# Allegro board pcb_proiect.brd
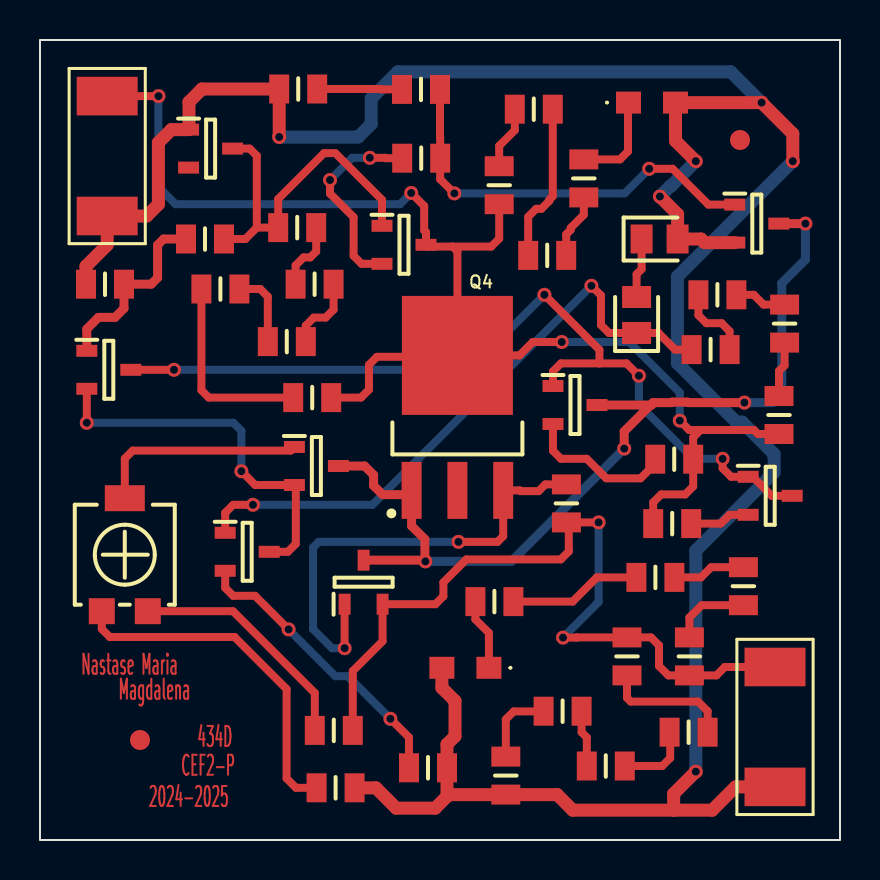
[diagram p0: board, top side]
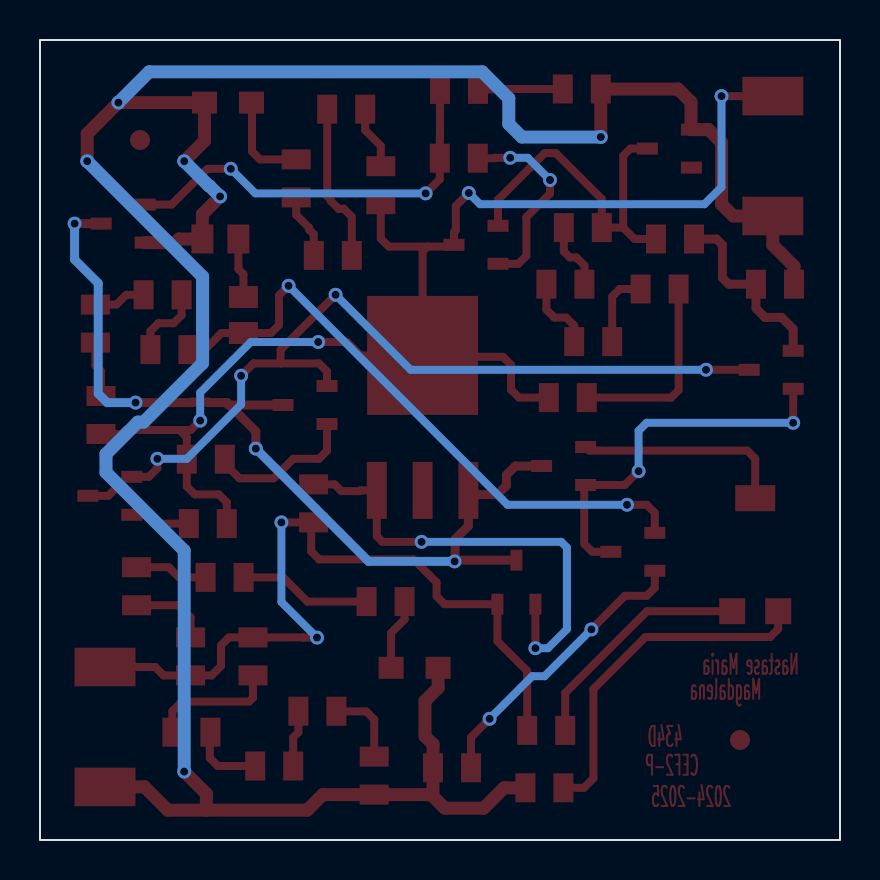
[diagram p1: board, bottom side, seen from below]

Outline 40 x 40 mm; copper layers: TOP, BOTTOM. Coordinates in mm from the lower left corner of the outline.
Outline path: rectangle 0,0 40,40

## Design rules (mm)
nets with their own width: min track width 0.4; nets N58868 N58948 N58962 N59152 N59158 N59164 N59308 N59360 N59366 N59416 N59508 N59514 N59560 N59566 N59572 N59678 N59710 N59736 N59772 N59798 N59804 N59976 N59994 N60030 N60066 N60146 N60152 N60246 N60324 N60330 N591201 N591401 N592241 N594281 N595481 N598561
nets with their own width: min track width 0.45; nets VIN VOUT
nets with their own width: min track width 0.65; nets GND

## Placement (name value [footprint] x y rotation side)
D2  1N4148  [DIOC2012X95N]  29.83 26.25 90 top
D10  1N4148  [DIOC2012X95N]  30.98 30.05 0 top
D16  BZX84C5V1  [SOT95P230X110-3N]  8.53 34.57 0 top
D17  3V,LED,LED  [OFSMD2012B]  30.6 36.87 0 top
D18  3V,LED,LED  [OFSMD2012B]  21.27 8.61 180 top
J1  CON2  [SMR2512]  3.36 31.2 90 top
J2  CON2  [SMR2512]  36.75 8.65 270 top
NOREF  -  [unnamed]  35 35 0 top
NOREF#2  -  [unnamed]  5 5 0 top
Q1  BC846B  [SOT95P230X110-3N]  3.44 23.51 0 top
Q2  BC846B  [SOT95P230X110-3N]  13.82 18.7 0 top
Q3  BC846B  [SOT95P230X110-3N]  10.36 14.41 0 top
Q4  MJD31C  [TO229P990X238-4N]  20.87 21.63 90 top
Q5  BC846B  [SOT95P230X110-3N]  16.18 12.89 90 top
Q6  BC846B  [SOT95P230X110-3N]  35.84 30.82 0 top
Q7  BC846B  [SOT95P230X110-3N]  18.2 29.76 0 top
Q8  BC856B  [SOT95P230X110-3N]  26.75 21.75 0 top
Q9  BC856B  [SOT95P230X110-3N]  36.51 17.21 0 top
R2  200  [RESC2013X65N]  19.4 3.61 0 top
R3  51  [RESC2013X65N]  31.71 19.04 180 top
R5  4.7k  [RESC2013X65N]  14.69 5.48 180 top
R6  2k  [RESC2013X65N]  14.78 2.61 0 top
R9  2k  [TS53YL]  5.39 11.44 270 top
R10  65  [RESC2013X65N]  19.05 37.53 180 top
R11  2k  [RESC2013X65N]  19.06 34.09 0 top
R13  51  [RESC2013X65N]  31.61 15.82 0 top
R15  10k  [RESC2013X65N]  3.25 27.79 180 top
R22  200  [RESC2013X65N]  12.91 37.55 180 top
R25  1.2  [RESC2013X65N]  26.32 16.83 270 top
R26  3.2k  [RESC2013X65N]  8.25 30.05 180 top
R27  500  [RESC2013X65N]  36.95 21.25 90 top
R28  500  [RESC2013X65N]  37.23 25.82 90 top
R29  500  [RESC2013X65N]  33.87 27.26 180 top
R30  500  [RESC2013X65N]  33.53 24.52 180 top
R31  200  [RESC2013X65N]  12.86 30.62 0 top
R32  200  [RESC2013X65N]  13.73 27.79 0 top
R33  200  [RESC2013X65N]  12.34 24.92 180 top
R34  200  [RESC2013X65N]  9.02 27.55 180 top
R35  200  [RESC2013X65N]  13.61 22.12 0 top
R37  150  [RESC2013X65N]  29.35 9.18 90 top
R38  150  [RESC2013X65N]  32.43 5.39 0 top
R39  150  [RESC2013X65N]  28.29 3.7 0 top
R40  150  [RESC2013X65N]  26.13 6.44 0 top
R41  80  [RESC2013X65N]  23.29 3.22 90 top
R42  510  [RESC2013X65N]  22.96 32.74 270 top
R44  510  [RESC2013X65N]  24.69 36.54 180 top
R45  510  [RESC2013X65N]  25.36 29.23 180 top
R46  510  [RESC2013X65N]  27.19 33.08 270 top
R47  100  [RESC2013X65N]  32.47 9.18 270 top
R48  150  [RESC2013X65N]  35.17 12.69 270 top
R49  220  [RESC2013X65N]  30.77 13.13 0 top
R50  220  [RESC2013X65N]  22.72 11.92 0 top

## Library data of the parts
D2 = D1N4148_5
D10 = D1N4148_6
D16 = BZX84C5V1/SOT_13
D17 = LED_14
D18 = LED_13
J1 J2 = CON2
Q1-Q3 Q5-Q7 = BC846B
Q4 = MJD31C/SOT_0
Q8 Q9 = BC856B
R2 R3 R5 R6 R10 R11 R13 R15 R22 R25-R35 R37-R42 R44-R50 = R
R9 = POT_2

## Footprints (pads in the part's own frame, mm; a bottom-side part is the same pattern mirrored in y, then rotated)
DIOC2012X95N
  rect 1.1x1.45 smd: 1(-0.9,0) 2(0.9,0)
OFSMD2012B
  rect 1.25x1.1 smd: 1(-1.175,0) 2(1.175,0)
RESC2013X65N
  rect 1x1.45 smd: 1(-0.95,0) 2(0.95,0)
SMR2512
  rect 1.93x3.048 smd: 1(0,0) 2(5.994,0)
SOT95P230X110-3N
  rect 1.05x0.6 smd: 1(-1.1,0.95) 2(-1.1,-0.95) 3(1.1,0)
TO229P990X238-4N
  rect 2.85x1 smd: 1(-4.15,2.29) 2(-4.15,0) 3(-4.15,-2.29)
  rect 5.95x5.55 smd: 4(2.6,0)
TS53YL
  rect 1.3x1.3 smd: 1(0,0) 3(0,-2.3)
  rect 1.3x2 smd: 2(-5.65,-1.15)
unnamed
  round 1 smd: (0,0)

## Nets
GND: D10.2 D16.1 D17.2 D18.2 J1.1 J2.2 Q6.2(E) R2.2 R6.2 R15.2 R22.2 R41.1
VIN: Q1.1 R15.1 R26.2
VOUT: Q2.3 Q4.1 Q5.3 Q6.3 Q8.3
N58868: J1.2 Q4.4 Q7.3 R3.1 R13.1 R27.1 R35.2 R42.2
N58948: Q4.3 Q5.1 R25.1
N58962: J2.1 Q5.2(E) R5.1 R25.2 R37.2 R47.2
N59152: R37.1 R38.2
N59158: Q9.2(E) R13.2
N59164: Q8.2(E) R3.2
N59308: Q1.3 Q8.1 Q9.1 Q9.3
N59360: R38.1 R39.2
N59366: R42.1 R44.2
N59416: R48.1 R49.2
N59508: R27.2 R28.1
N59514: R5.2 R9.1
N59560: R49.1 R50.2
N59566: R44.1 R45.2
N59572: R39.1 R40.2
N59678: R28.2 R29.1
N59710: D18.1 R50.1
N59736: D16.3 Q7.1 R26.1 R31.1
N59772: R45.1 R46.2
N59798: Q7.2(E) R11.1
N59804: R40.1 R41.2
N59976: R29.2 R30.1
N59994: Q2.1 R9.2(T)
N60030: Q1.2(E) Q2.2(E) Q3.3
N60066: R6.1 R9.3
N60146: Q6.1 R10.1 R11.2
N60152: D2.1 Q3.1 R30.2
N60246: Q3.2(E) R2.1
N60324: D2.2 D10.1
N60330: R10.2 R22.1
N591201: R34.2 R35.1
N591401: R47.1 R48.2
N592241: R33.2 R34.1
N594281: R32.2 R33.1
N595481: R31.2 R32.1
N598561: D17.1 R46.1

Pads without a net: D16 2; Q4 2

## Via types
v1: diameter 0.7, hole 0.4, TOP to BOTTOM, 32 vias

## Routing (per net, layer and track width the routed paths; a pad name or vN(x,y) marks a point on that pad's centre or on a via; arc(x,y) is an arc through that point)
GND: length 134.6
  TOP w0.65: 20.35,2.18 19.76,1.59 17.81,1.59 16.79,2.61 R6.2 ; 20.35,2.18 R2.2 20.35,4.79 20.75,5.19 20.75,6.95 20.09,7.61 D18.2 ; 20.35,2.18 20.44,2.27 R41.1 25.86,2.27 26.64,1.49 31.68,1.49 ; v1(32.79,3.42) 31.68,2.31 31.68,1.49 ; v1(31,32.17) 31.88,31.29 D10.2 33.05,30.05 33.23,29.87 Q6.2 ; v1(32.79,33.94) 31.77,34.95 D17.2 v1(36.08,36.87) 37.64,35.31 v1(37.64,33.94) ; 31.68,1.49 33.61,1.49 34.77,2.66 J2.2 ; R15.2 2.3,28.69 3.36,29.75 J1.1 5.34,31.2 5.92,31.78 5.92,34.87 6.57,35.52 D16.1 7.45,35.54 7.45,36.9 8.1,37.55 R22.2 v1(11.96,35.15)
  BOTTOM w0.65: v1(32.79,3.42) 32.79,14.47 36.7,18.38 36.7,19.3 35.1,20.89 34.82,20.89 31.87,23.84 31.87,28.17 v1(37.64,33.94) ; v1(11.96,35.15) 15.91,35.15 16.56,35.8 16.56,37.08 17.89,38.41 34.54,38.41 v1(36.08,36.87) ; v1(32.79,33.94) 31.56,32.71 31.53,32.71 v1(31,32.17)
VIN: length 9.6
  TOP w0.45: Q1.1 2.34,25.55 2.92,26.13 3.75,26.13 4.2,26.58 R15.1 5.56,27.79 5.88,28.11 5.88,29.75 6.18,30.05 R26.2
VOUT: length 46.7
  TOP w0.45: 30.7,21.87 30.58,21.75 Q8.3 ; 30.7,21.87 30.65,21.87 29.21,20.43 v1(29.21,19.57) ; 30.7,21.87 31.58,21.87 31.61,21.89 32.37,21.89 32.4,21.87 v1(35.22,21.87) ; Q5.3 19.16,13.99 19.24,13.9 ; v1(38.27,30.82) Q6.3 ; Q2.3 16.23,18.7 16.68,18.25 16.68,17.72 17.13,17.27 18.37,17.27 Q4.1 18.58,15.7 19.24,15.04 19.24,13.9 ; 19.24,13.9 v1(19.27,13.93)
  BOTTOM w0.45: v1(29.21,19.57) 23.57,13.93 v1(19.27,13.93) ; v1(35.22,21.87) 36.64,21.87 37.09,22.32 37.09,27.84 38.27,29.02 v1(38.27,30.82)
N58868: length 67.7
  TOP w0.4: Q4.4 23.97,24.23 24.64,24.9 v1(26.09,24.9) ; Q4.4 20.8,24.16 16.85,24.16 16.45,23.76 16.45,22.52 16.05,22.12 R35.2 ; Q4.4 20.87,29.43 20.63,29.67 ; v1(31.99,20.97) 32.46,20.5 33.03,20.5 ; 33.03,20.5 35.7,20.5 35.9,20.3 R27.1 ; 33.03,20.5 32.66,20.13 R3.1 32.66,17.68 32.26,17.28 31.06,17.28 30.66,16.88 R13.1 ; 20.63,29.67 22.56,29.67 22.96,30.07 R42.2 ; 20.63,29.67 19.39,29.67 Q7.3 19.3,30.39 19.21,30.48 19.21,31.7 v1(18.56,32.35) ; J1.2 v1(5.92,37.19)
  BOTTOM w0.4: v1(31.99,20.97) 31.99,22.37 29.46,24.9 v1(26.09,24.9) ; v1(18.56,32.35) 18,31.79 6.78,31.79 5.92,32.64 v1(5.92,37.19)
N58948: length 23.6
  TOP w0.4: v1(20.92,14.91) 22.88,14.91 23.16,15.19 Q4.3 23.99,17.48 24.02,17.44 24.93,17.44 25.27,17.78 R25.1 ; v1(15.23,9.59) Q5.1
  BOTTOM w0.4: v1(15.23,9.59) 14.6,9.59 13.65,10.54 13.65,14.62 13.94,14.91 v1(20.92,14.91)
N58962: length 39.5
  TOP w0.4: v1(26.15,10.12) 26.83,10.12 26.84,10.13 R37.2 30.55,10.13 30.95,9.73 30.95,8.7 31.42,8.23 R47.2 33.82,8.23 34.24,8.65 J2.1 ; R5.1 15.64,8.45 17.13,9.94 Q5.2 19.77,11.79 20.17,12.19 20.17,12.88 21.32,14.03 26.04,14.03 26.44,14.43 26.44,15.76 R25.2 v1(27.93,15.88)
  BOTTOM w0.4: v1(26.15,10.12) 27.93,11.9 v1(27.93,15.88)
N59152: length 6.5
  TOP w0.4: R37.1 29.35,7.11 29.54,6.92 32.9,6.92 33.38,6.44 R38.2
N59158: length 3
  TOP w0.4: R13.2 34.04,15.82 34.48,16.26 Q9.2
N59164: length 7.5
  TOP w0.4: R3.2 30.76,18.82 30.03,18.08 28.31,18.08 27.34,19.06 26.05,19.06 25.65,19.46 Q8.2
N59308: length 43.7
  TOP w0.4: Q9.3 36.59,17.21 35.63,18.16 Q9.1 34.56,18.16 34.13,18.59 v1(34.13,19.06) ; 27.97,23.83 29.33,23.83 v1(29.94,23.21) ; 27.97,23.83 27.97,24.51 v1(25.22,27.26) ; 27.97,23.83 26.05,23.83 25.65,23.43 Q8.1 25.88,22.7 ; Q1.3 v1(6.7,23.51)
  BOTTOM w0.4: v1(25.22,27.26) 21.47,23.51 v1(6.7,23.51) ; v1(34.13,19.06) 32.66,19.06 29.94,21.78 v1(29.94,23.21)
N59360: length 3.7
  TOP w0.4: R38.1 31.51,5.36 31.51,4.1 31.11,3.7 R39.2
N59366: length 3.2
  TOP w0.4: R44.2 23.74,35.49 22.96,34.71 R42.1
N59416: length 3.7
  TOP w0.4: R49.2 33.05,13.13 33.56,13.64 R48.1
N59508: length 2.8
  TOP w0.4: R28.1 37.23,23.73 36.95,23.45 R27.2
N59514: length 11.9
  TOP w0.4: R9.1 9.65,11.44 13.74,7.35 R5.2
N59560: length 6.7
  TOP w0.4: R50.2 26.63,11.92 27.84,13.13 R49.1
N59566: length 8
  TOP w0.4: R44.1 25.64,32.19 25.47,32.02 25.47,31.96 25.07,31.56 24.81,31.56 24.41,31.16 R45.2
N59572: length 2.8
  TOP w0.4: R39.1 27.34,5.13 27.08,5.39 R40.2
N59678: length 2.6
  TOP w0.4: R28.2 36.18,26.77 35.69,27.26 R29.1
N59710: length 3.6
  TOP w0.4: D18.1 22.45,10.36 21.77,11.03 R50.1
N59736: length 17.7
  TOP w0.4: 10.84,30.62 10.84,34.21 10.48,34.57 D16.3 ; 10.84,30.62 10.27,30.05 R26.1 ; 10.84,30.62 R31.1 11.91,32.05 14.2,34.34 14.77,34.34 17.1,32.01 Q7.1
N59772: length 3.3
  TOP w0.4: R45.1 26.31,30.28 26.54,30.51 26.54,30.61 27.19,31.26 R46.2
N59798: length 9.9
  TOP w0.4: v1(16.49,34.11) 17.26,34.11 17.28,34.09 R11.1 ; Q7.2 16.08,28.81 15.68,29.21 15.68,31.14 14.5,32.32 v1(14.5,33)
  BOTTOM w0.4: v1(16.49,34.11) 15.61,34.11 v1(14.5,33)
N59804: length 3.9
  TOP w0.4: R40.1 25.17,6.43 23.69,6.43 23.29,6.03 R41.2
N59976: length 3.8
  TOP w0.4: R29.2 32.92,26.24 33.32,25.84 34.08,25.84 34.48,25.44 R30.1
N59994: length 10.7
  TOP w0.4: R9.2 4.24,19.07 4.64,19.47 12.54,19.47 Q2.1
N60030: length 19
  TOP w0.4: Q1.2 v1(2.34,20.86) ; Q3.3 12.39,14.41 12.79,14.81 12.79,17.68 Q2.2 10.76,17.75 v1(10.07,18.44)
  BOTTOM w0.4: v1(2.34,20.86) 9.67,20.86 10.07,20.46 v1(10.07,18.44)
N60066: length 17.5
  TOP w0.4: R6.1 12.8,2.61 12.33,3.08 12.33,7.55 9.73,10.15 3.49,10.15 3.09,10.55 R9.3
N60146: length 20.8
  TOP w0.4: v1(30.46,33.56) 31.63,33.56 33.42,31.77 Q6.1 ; v1(20.72,32.33) 20.01,33.04 R11.2 20.01,35.14 20,35.15 R10.1
  BOTTOM w0.4: v1(30.46,33.56) 29.23,32.33 v1(20.72,32.33)
N60152: length 31.2
  TOP w0.4: v1(10.65,16.76) 9.66,16.76 9.26,16.36 Q3.1 ; R30.2 31.75,24.52 30.92,25.35 D2.1 28.45,25.35 28.05,25.75 28.05,27.23 v1(27.57,27.71)
  BOTTOM w0.4: v1(10.65,16.76) 16.62,16.76 v1(27.57,27.71)
N60246: length 14.7
  TOP w0.4: Q3.2 9.26,12.61 9.66,12.21 10.75,12.21 v1(12.43,10.53) ; R2.1 18.45,5.13 v1(17.52,6.06)
  BOTTOM w0.4: v1(17.52,6.06) 15.39,8.19 14.77,8.19 v1(12.43,10.53)
N60324: length 3
  TOP w0.4: D2.2 29.83,28.29 30.08,28.54 D10.1
N60330: length 4.2
  TOP w0.4: R22.1 17.04,37.55 17.06,37.53 R10.2
N591201: length 9.8
  TOP w0.4: R35.1 8.44,22.12 8.07,22.49 R34.2
N591401: length 4
  TOP w0.4: R48.2 33.08,11.74 32.47,11.13 R47.1
N592241: length 3.8
  TOP w0.4: R33.2 11.39,27.17 11.01,27.55 R34.1
N594281: length 3.8
  TOP w0.4: R33.1 13.29,25.72 13.69,26.12 14.28,26.12 14.68,26.52 R32.2
N595481: length 3.4
  TOP w0.4: R32.1 12.78,28.73 13.18,29.13 13.51,29.13 13.81,29.43 R31.2
N598561: length 4.8
  TOP w0.4: D17.1 29.4,36.84 29.4,34.43 29,34.03 R46.1

## Text on the board
TOP: Nastase Maria | Magdalena | 2024-2025 | CEF2-P | 434D
XSECTION_CHART: *  SURFACE | L1 TOP CONDUCTOR | *  DIELECTRIC | L2 BOTTOM CONDUCTOR | DESIGN CROSS SECTION CHART | ___________________________ | TOTAL THICKNESS 1.6 MM | 1-2
NCLEGEND-1-2: FIGURE | FINISHED_SIZE | 0.4 | DRILL CHART: TOP to BOTTOM | ALL UNITS ARE IN MILLIMETERS | PLATED | QTY | 32
